# EAGLE board ArtNet_Node_v2 (EAGLE 7.0.0)
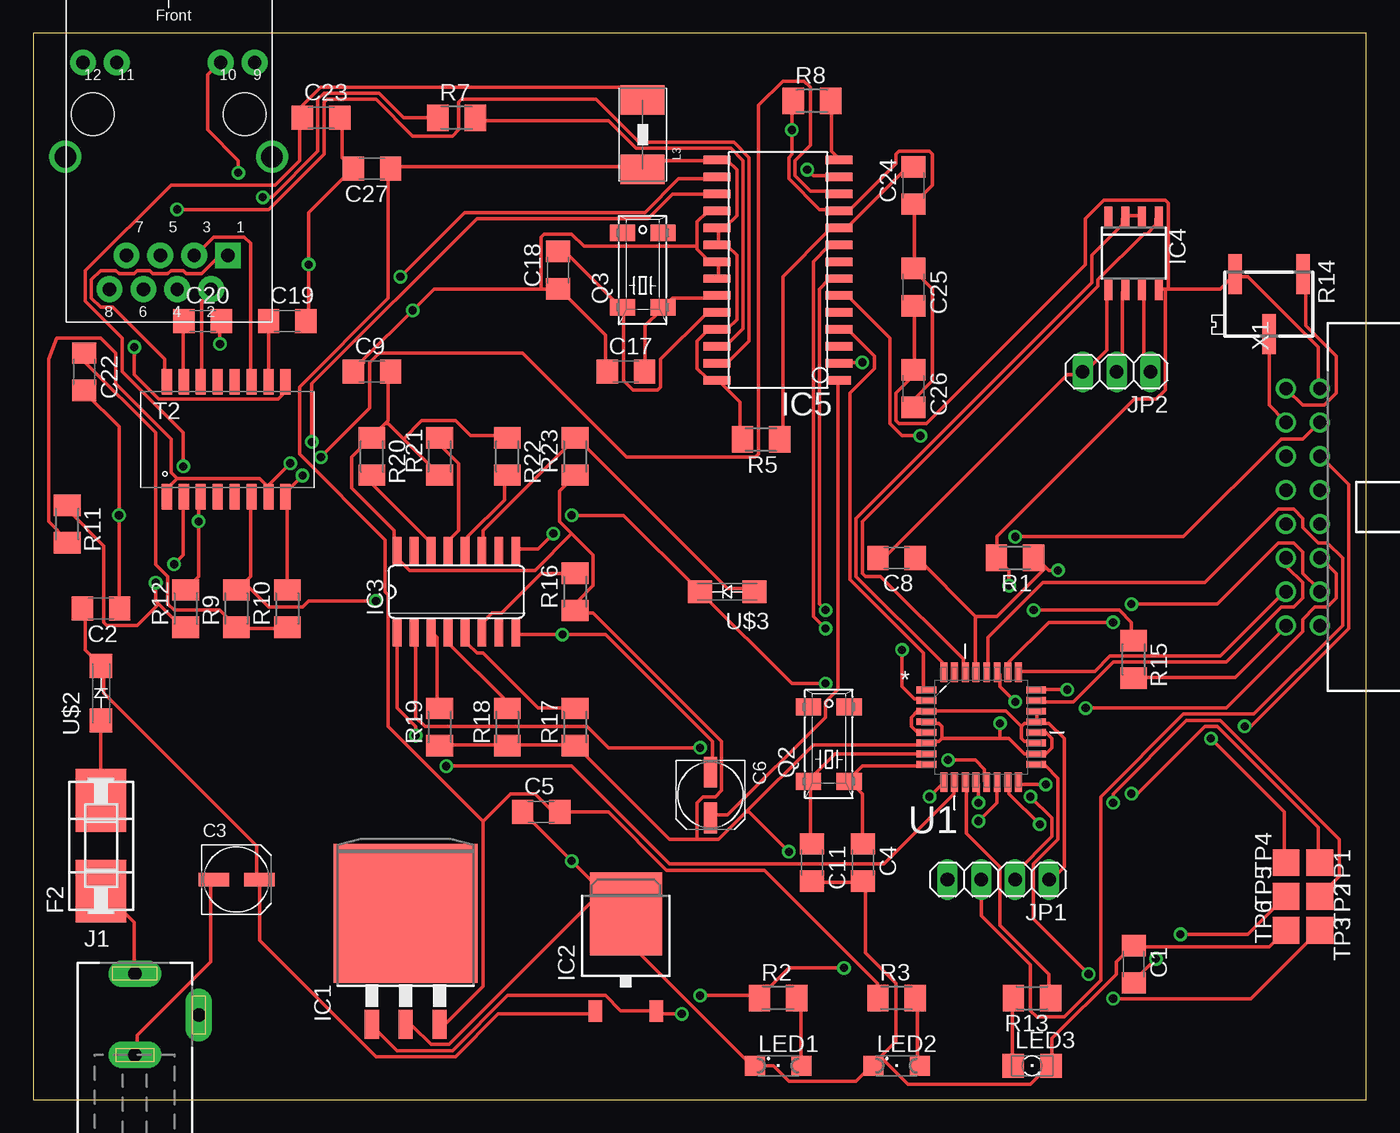
[diagram p0: board, top side]
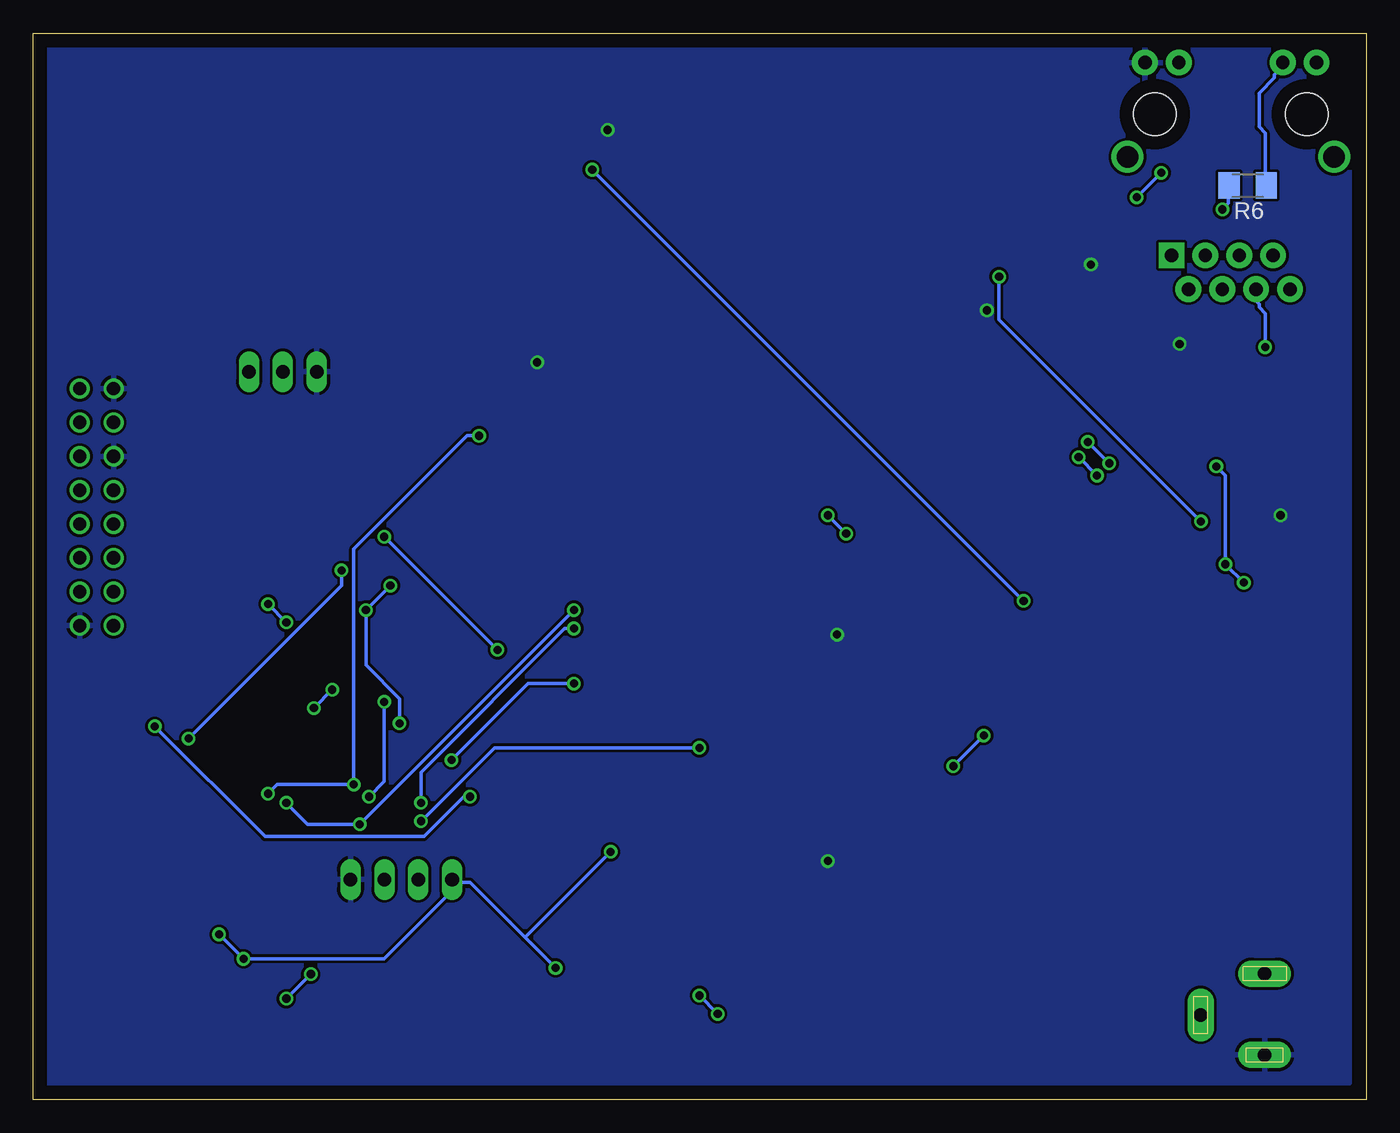
[diagram p1: board, bottom side, seen from below]

Size 100 x 80 mm. Coordinates in mm from the lower left corner, seen from the top.
Outline: 0,0 100,0 100,80 0,80 0,0
Copper layers (1*16): Top 0.035mm / dielectric 1.5mm / Bottom 0.035mm
Design rules "default": minimum track width 10mil, minimum drill 24mil, track to track 8mil, track to pad 8mil, pad to pad 8mil, via to via 8mil, smd to smd 8mil, copper to edge 40mil, drill to drill 8mil, minimum pad ring 10mil, minimum via ring 8mil, stop-mask expansion 4mil, vias tented up to drill 0mil, thermal gap 10mil
Net classes: 0 default: clearance 0.205 mm

## Footprints (pad centres in the part's own frame; a part is rotated, then mirrored left to right if it is on the bottom)
C1206 = smd 1.6 x 1.8: 1 -1.4,0; 2 1.4,0
UD-5X5,8_NICHICON = smd 2.3 x 1: + 1.725,0; - -1.7,0
OMNIBLOK = smd 4.7 x 3.8: P$1 -3.4,0; P$2 3.4,0
TO263-3 = smd 1.067 x 2.159: 1 -2.54,-5.791; 2 0,-5.791; 3 2.54,-5.791 | smd 10.8 x 10.41: TAB 0,2.54
TO252 = smd 1 x 1.6: 1 -2.28,-4.8; 2 2.28,-4.8 | smd 5.4 x 6.2: 3 0,2.5
SO16 = smd 0.66 x 2.032: 1 -4.445,-3.073; 2 -3.175,-3.073; 3 -1.905,-3.073; 4 -0.635,-3.073; 5 0.635,-3.073; 6 1.905,-3.073; 7 3.175,-3.073; 8 4.445,-3.073; 9 4.445,3.073; 10 3.175,3.073; 11 1.905,3.073; 12 0.635,3.073; 13 -0.635,3.073; 14 -1.905,3.073; 15 -3.175,3.073; 16 -4.445,3.073
D_R-PDSO-G8 = smd 0.6 x 1.5: 1 -1.905,-2.75; 2 -0.635,-2.75; 3 0.635,-2.75; 4 1.905,-2.75; 5 1.905,2.75; 6 0.635,2.75; 7 -0.635,2.75; 8 -1.905,2.75
SO28W = smd 0.635 x 1.778: 1 -8.255,-4.572 | smd 0.635 x 2.032: 2 -6.985,-4.572; 3 -5.715,-4.572; 4 -4.445,-4.572; 5 -3.175,-4.572; 6 -1.905,-4.572; 7 -0.635,-4.572; 8 0.635,-4.572; 9 1.905,-4.572; 10 3.175,-4.572; 11 4.445,-4.572; 12 5.715,-4.572; 13 6.985,-4.572; 14 8.255,-4.572; 15 8.255,4.572; 16 6.985,4.572; 17 5.715,4.572; 18 4.445,4.572; 19 3.175,4.572; 20 1.905,4.572; 21 0.635,4.572; 22 -0.635,4.572; 23 -1.905,4.572; 24 -3.175,4.572; 25 -4.445,4.572; 26 -5.715,4.572; 27 -6.985,4.572; 28 -8.255,4.572
DCJ0202 = drill 1 pad 2 long: 1 0,3.1; 2 4.8,0; 3 0,-3
1X04 = drill 1.016 long: 1 -3.81,0; 2 -1.27,0; 3 1.27,0; 4 3.81,0
1X03 = drill 1.016 long: 1 -2.54,0; 2 0,0; 3 2.54,0
WE-SMD_7427930 = smd 2.2 x 3.3: 1 -2.6,0; 2 2.6,0
SML1206 = smd 1.5 x 1.5: A 1.75,0; C -1.75,0
1206 = smd 1.6 x 1.803: A -1.422,0; C 1.422,0
MM20SS = smd 1.27 x 1.88: 1 -2.794,-1.524; 2 2.794,-1.524; 3 2.794,1.524; 4 -2.794,1.524
M1206 = smd 1.6 x 2: 1 -1.4,0; 2 1.4,0
RTRIMTS63X = smd 1 x 3: 1 -2.55,-2.25; 2 0,2.25; 3 2.55,-2.25
WE-LAN_10/100_BASETX_7490100111 = smd 1.91 x 0.76: 1 -4.317,3.945; 2 -4.317,2.675; 3 -4.317,1.405; 4 -4.317,0.135; 5 -4.317,-1.135; 6 -4.317,-2.405; 7 -4.317,-3.675; 8 -4.317,-4.945; 9 4.317,-4.945; 10 4.317,-3.675; 11 4.317,-2.405; 12 4.317,-1.135; 13 4.317,0.135; 14 4.317,1.405; 15 4.317,2.675; 16 4.317,3.945
TP20SQ = smd 2 x 2: TP 0,0
QFP80P900X900X120-32N = smd 1.473 x 0.508: 1 -4.115,2.794; 2 -4.115,2.007; 3 -4.115,1.194; 4 -4.115,0.406; 5 -4.115,-0.406; 6 -4.115,-1.194; 7 -4.115,-2.007; 8 -4.115,-2.794; 17 4.115,-2.794; 18 4.115,-2.007; 19 4.115,-1.194; 20 4.115,-0.406; 21 4.115,0.406; 22 4.115,1.194; 23 4.115,2.007; 24 4.115,2.794 | smd 0.508 x 1.473: 9 -2.794,-4.115; 10 -2.007,-4.115; 11 -1.194,-4.115; 12 -0.406,-4.115; 13 0.406,-4.115; 14 1.194,-4.115; 15 2.007,-4.115; 16 2.794,-4.115; 25 2.794,4.115; 26 2.007,4.115; 27 1.194,4.115; 28 0.406,4.115; 29 -0.406,4.115; 30 -1.194,4.115; 31 -2.007,4.115; 32 -2.794,4.115
1XRJ45_MM_JACK = drill 1.6: CASEGND -7.75,-4.2; P$2 7.75,-4.2 | drill 1 pad 1.93: GND 0.635,-14.13; L1 6.44,2.88; L2 3.9,2.88; L3 -6.44,2.88; L4 -3.9,2.88; P$9 -0.635,-11.59; RX0 -4.445,-14.13; RX+ 1.905,-11.59; RX- -1.905,-14.13; TX0 -3.175,-11.59; TX- 3.175,-14.13 | drill 1 pad 1.93 square: TX+ 4.445,-11.59 | hole 3.2: 5.7,-1; -5.7,-1
SMA-DO214AC = smd 1.8 x 1.7: A -2.05,0; K 2.05,0
PAK100/2500-5-16 = drill 1 pad 1.422: 1 -8.89,-1.27; 2 -8.89,1.27; 3 -6.35,-1.27; 4 -6.35,1.27; 5 -3.81,-1.27; 6 -3.81,1.27; 7 -1.27,-1.27; 8 -1.27,1.27; 9 1.27,-1.27; 10 1.27,1.27; 11 3.81,-1.27; 12 3.81,1.27; 13 6.35,-1.27; 14 6.35,1.27; 15 8.89,-1.27; 16 8.89,1.27

## Placement (x,y rotation side)
C1  100n  [C1206]  82.55,10.16 270 top
C2  100n  [C1206]  5.08,36.83 180 top
C3  10Âµ  [UD-5X5,8_NICHICON]  15.24,16.51 0 top
C4  22p  [C1206]  62.23,17.78 270 top
C5  100n  [C1206]  38.1,21.59 0 top
C6  10Âµ  [UD-5X5,8_NICHICON]  50.8,22.86 270 top
C8  100n  [C1206]  64.77,40.64 180 top
C9  100n  [C1206]  25.4,54.61 0 top
C11  22p  [C1206]  58.42,17.78 270 top
C17  22p  [C1206]  44.45,54.61 0 top
C18  22p  [C1206]  39.37,62.23 90 top
C19  1n  [C1206]  19.05,58.42 0 top
C20  1n  [C1206]  12.7,58.42 0 top
C22  10n  [C1206]  3.81,54.61 270 top
C23  10n  [C1206]  21.59,73.66 0 top
C24  100n  [C1206]  66.04,68.58 90 top
C25  100n  [C1206]  66.04,60.96 270 top
C26  100n  [C1206]  66.04,53.34 270 top
C27  100n  [C1206]  25.4,69.85 180 top
F2  FUSE  [OMNIBLOK]  5.08,19.05 90 top
IC1  LM2937  [TO263-3]  27.94,11.43 0 top
IC2  7805DT  [TO252]  44.45,11.43 0 top
IC3  74LS165D  [SO16]  31.75,38.1 0 top
IC4  75176AD  [D_R-PDSO-G8]  82.55,63.5 180 top
IC5  ENC28J60-SO  [SO28W]  55.88,62.23 90 top
J1  DCJ0202  [DCJ0202]  7.62,6.35 0 top
JP1  [1X04]  72.39,16.51 180 top
JP2  [1X03]  81.28,54.61 180 top
L3  [WE-SMD_7427930]  45.72,72.39 90 top
LED1  [SML1206]  55.88,2.54 0 top
LED2  [SML1206]  64.77,2.54 0 top
LED3  [1206]  74.93,2.54 0 top
Q2  25Mhz  [MM20SS]  59.69,26.67 90 top
Q3  25Mhz  [MM20SS]  45.72,62.23 90 top
R1  10k  [M1206]  73.66,40.64 180 top
R2  820  [M1206]  55.88,7.62 0 top
R3  180  [M1206]  64.77,7.62 0 top
R5  10k  [M1206]  54.61,49.53 180 top
R6  180  [M1206]  8.89,68.58 180 bottom
R7  180  [M1206]  31.75,73.66 0 top
R8  2,7k  [M1206]  58.42,74.93 0 top
R9  47  [M1206]  15.24,36.83 90 top
R10  47  [M1206]  19.05,36.83 90 top
R11  47  [M1206]  2.54,43.18 270 top
R12  47  [M1206]  11.43,36.83 90 top
R13  180  [M1206]  74.93,7.62 180 top
R14  [RTRIMTS63X]  92.71,59.69 180 top
R15  180  [M1206]  82.55,33.02 270 top
R16  10k  [M1206]  40.64,38.1 90 top
R17  10k  [M1206]  40.64,27.94 90 top
R18  10k  [M1206]  35.56,27.94 90 top
R19  10k  [M1206]  30.48,27.94 90 top
R20  10k  [M1206]  25.4,48.26 270 top
R21  10k  [M1206]  30.48,48.26 90 top
R22  10k  [M1206]  35.56,48.26 270 top
R23  10k  [M1206]  40.64,48.26 90 top
T2  WE-LAN  [WE-LAN_10/100_BASETX_7490100111]  13.97,49.53 90 top
TP1  TPSQTP20SQ  [TP20SQ]  96.52,17.78 270 top
TP2  TPSQTP20SQ  [TP20SQ]  96.52,15.24 270 top
TP3  TPSQTP20SQ  [TP20SQ]  96.52,12.7 270 top
TP4  TPSQTP20SQ  [TP20SQ]  93.98,17.78 90 top
TP5  TPSQTP20SQ  [TP20SQ]  93.98,15.24 90 top
TP6  TPSQTP20SQ  [TP20SQ]  93.98,12.7 90 top
U1  ATMEGA328P-AU  [QFP80P900X900X120-32N]  71.12,27.94 0 top
U$1  [1XRJ45_MM_JACK]  10.16,74.93 0 top
U$2  GF1  [SMA-DO214AC]  5.08,30.48 90 top
U$3  GF1  [SMA-DO214AC]  52.07,38.1 180 top
X1  2516-5  [PAK100/2500-5-16]  95.25,44.45 270 top

## Library data of the parts
C1-C6 C8 C9 C11 C17-C20 C22-C27 R1-R3 R5-R13 R15-R23 = rcl
F2 = f-lf-omniblok-s
IC1 IC2 = linear
IC3 = 74xx-us
IC4 = 751xx
IC5 = enc28j60centered
J1 = con-jack; OC_FARNELL: unknown; OC_NEWARK: unknown
JP1 JP2 = pinhead
L3 T2 = wuerth_elektronik_eisos__v6.5
LED1-LED3 = led
Q2 Q3 = crystal
R14 = resistor
TP1-TP6 = testpad
U1 = Atmel_By_element14_Batch_1-00; MPN: ATMEGA328P-AU; OC_FARNELL: 1715486; OC_NEWARK: 14R4631; PACKAGE: TQFP-32; SUPPLIER: Atmel
U$1 = con-ppt_prj006
U$2 U$3 = diode
X1 = con-3m; MPN: D2516-5002-AR; OC_FARNELL: 9838376; OC_NEWARK: 12P7055

## Nets
+3V3: C5.2 C27.1 IC1.3 IC5.15 IC5.19 IC5.20 IC5.25 IC5.28 L3.1 R3.1 R5.2
DIR_IO: IC4.2 IC4.3 U1.32
ETH_CS: IC5.9 U1.12
ETH_INT: IC5.4 U1.1
GND: C1.1 C2.1 C3.- C4.2 C5.1 C6.- C8.2 C9.1 C11.2 C17.1 C18.1 C19.2 C20.2 C22.2 C23.2 C24.1 C25.1 C26.2 C27.2 IC1.2 IC2.3 IC3.8 IC4.5 IC5.2 IC5.11 IC5.18 IC5.21 IC5.22 J1.3 JP1.1 JP2.3 LED1.C LED2.C LED3.C R8.1 R14.1 TP6.TP U1.3 U1.5 U1.19 U1.21 U1.22 U$1.L1 X1.1 X1.5 X1.16
INT_IO: IC3.11 R23.2 U$3.A
L2: R6.1 U$1.L4
L3: R7.1 U$1.L2
MISO: IC5.6 TP1.TP U1.16
MOSI: IC5.7 TP2.TP U1.15
N$1: T2.16 U$1.TX+
N$2: C19.1 T2.10
N$3: T2.14 U$1.TX-
N$4: C20.1 T2.15
N$5: IC5.8
N$6: F2.P$2 U$2.A
N$7: T2.11 U$1.RX+
N$8: T2.9 U$1.RX-
N$9: IC4.7 JP2.1
N$10: F2.P$1 J1.1
N$11: IC5.27 R6.2
N$12: JP1.2 U1.27
N$13: IC4.6 JP2.2
N$14: IC5.26 R7.2
N$15: C2.2 C3.+ IC2.1 U$2.K
N$16: LED2.A R3.2
N$20: C18.2 IC5.24 Q3.4
N$21: C17.2 IC5.23 Q3.1
N$22: IC5.12 R10.2 T2.8
N$23: IC5.13 R9.2 T2.6
N$24: IC5.16 R12.2 T2.3
N$25: IC5.17 R11.2 T2.1 T2.7
N$26: IC5.14 R8.2
N$27: C6.+ IC5.1
N$28: JP1.3 U1.28
N$29: C22.1 R9.1 R10.1
N$30: C24.2 IC5.10 R5.1
N$31: LED1.A R2.2
N$33: R13.1 U1.11
N$34: R14.2 X1.3
N$35: LED3.A R13.2
N$38: R15.2 X1.15
N$39: IC3.12 R22.2
N$40: IC3.13 R21.2
N$41: IC3.14 R20.2
N$42: IC3.3 R19.2
N$43: IC3.4 R18.2
N$44: IC3.5 R17.2
N$45: IC3.6 R16.2
N$54: C4.1 Q2.1 U1.8
N$55: C11.1 Q2.4 U1.7
N$248: C23.1 L3.2 R11.1 R12.1 T2.2
PC0: U1.23 X1.11
PC1: U1.24 X1.12
PC2: U1.25 X1.13
PC3: U1.26 X1.14
PD4: U1.2 X1.4
PD5: U1.9 X1.6
PISO1: IC3.1 U1.10
PISO2: IC3.2 U1.14
PISO3: IC3.9 U1.13 U$3.K
RESET: C8.1 R1.1 TP4.TP U1.29
RXD: IC4.1 U1.30
S$1: U$1.L3
SCK: TP3.TP U1.17
TXD: IC4.4
VCC: C1.2 C9.2 C25.2 C26.1 IC1.1 IC2.2 IC3.16 IC4.8 JP1.4 R1.2 R2.1 R14.3 R15.1 R16.1 R17.1 R18.1 R19.1 R20.1 R21.1 R22.1 R23.1 TP5.TP U1.4 U1.6 U1.18 U1.20 X1.2

## Tracks (layer width: path | path; a pad name or v marks a point on that pad's centre or on a via)
+3V3
  Top 0.254: R5.2 53.01,49.57 53.01,52.33 51.41,53.93 IC5.28 51.18,54.16 50.49,54.16 49.8,54.85 49.8,56.92 50.49,57.6 51.18,57.6 IC5.25 51.41,57.83 52.1,57.83 52.78,58.52 52.78,63.34 52.1,64.03 51.41,64.03 IC5.20 51.41,64.26 51.41,65.18 IC5.19 51.41,65.41 51.87,65.41 52.78,66.33 52.78,69.77 52.1,70.46 51.41,70.46 IC5.15 51.18,70.46 46.36,70.46 45.9,70 L3.1 45.67,70 26.85,70 C27.1 26.62,69.77 26.62,60.13 19.97,53.47 19.97,48.42 26.39,42 26.39,38.1 26.62,37.87 26.62,28 33.74,20.88 | 33.74,20.88 35.8,22.95 37.64,22.95 38.78,21.8 39.47,21.8 C5.2 39.7,21.57 43.15,21.57 47.51,17.21 54.85,17.21 63.34,8.72 63.34,7.8 R3.1 | 33.74,20.88 33.74,8.49 30.98,5.74 30.52,5.74 IC1.3
DIR_IO
  Top 0.254: U1.32 68.16,32.13 68.16,32.82 61.74,39.24 61.74,43.6 79.41,61.28 79.41,63.34 81.7,65.64 81.7,66.1 IC4.3 81.93,66.33 83.08,66.33 IC4.2
ETH_CS  (via drill 0.61)
  Top 0.254: v70.92,22.26 70.92,23.64 U1.12 | v59.44,35.34 58.52,36.26 58.52,62.88 59.67,64.03 60.36,64.03 IC5.9
  Bottom 0.254: v70.92,22.26 70.92,24.56 60.13,35.34 v59.44,35.34
ETH_INT
  Top 0.254: U1.1 66.78,30.75 66.78,33.51 61.28,39.02 61.28,53.01 63.11,54.85 63.11,55.77 61.28,57.6 60.59,57.6 IC5.4
GND  (via drill 0.61)
  Top 0.254: 42.69,15.61 44.29,14 IC2.3 | 42.69,15.61 v40.39,17.9 36.72,21.57 C5.1 | 42.69,15.61 31.21,4.13 29.84,4.13 28.46,5.51 28,5.51 IC1.2 | 42.69,15.61 IC2.3 | C11.2 58.52,16.29 62.19,16.29 C4.2 62.42,16.29 62.42,11.02 64.72,8.72 64.72,4.36 63.57,3.21 | LED2.C 62.88,2.52 61.74,1.38 56.69,1.38 55.54,2.52 54.16,2.52 LED1.C 53.93,2.52 44.52,11.93 44.52,13.77 IC2.3 | 63.57,3.21 63.11,2.75 LED2.C | TP6.TP 93.86,12.62 92.72,11.47 82.62,11.47 C1.1 82.39,11.47 81.24,10.33 81.24,9.41 76.42,4.59 76.42,2.75 LED3.C 76.19,2.52 74.82,1.15 65.64,1.15 63.57,3.21 | 63.57,3.21 LED2.C | IC5.22 51.41,61.74 51.41,62.65 IC5.21 51.18,62.88 50.72,62.88 49.8,63.8 49.8,64.03 | 49.8,64.03 49.8,65.87 50.49,66.56 51.18,66.56 IC5.18 | 38.1,60.82 39.24,60.82 C18.1 39.47,60.82 42.92,57.38 42.92,54.62 C17.1 | 38.1,60.82 30.06,60.82 v28.46,59.21 24.79,55.54 24.79,55.31 24.1,54.62 C9.1 | 49.8,64.03 41.31,64.03 40.39,64.95 38.33,64.95 38.1,64.72 38.1,60.82 | R8.1 56.92,74.82 v56.92,72.75 56.92,70.92 56.69,70.69 56.69,69.08 58.98,66.78 60.36,66.78 IC5.11 60.59,66.78 61.28,66.78 64.72,70.23 64.72,70.92 64.95,71.14 67.24,71.14 67.47,70.92 67.47,68.62 66.1,67.24 C24.1 66.1,67.01 66.1,62.42 C25.1 66.1,62.19 67.47,60.82 67.47,53.93 66.1,52.56 66.1,52.1 C26.2 | IC3.8 36.26,34.88 v39.7,34.88 42.92,34.88 50.95,26.85 50.95,24.79 C6.- | C2.1 6.43,36.95 v6.43,43.83 6.43,50.49 3.9,53.01 C22.2 | C19.2 20.66,58.52 v20.66,62.65 20.66,66.56 23.87,69.77 C27.2 23.87,70 23.18,70.69 23.18,73.44 C23.2 | U1.5 66.78,27.54 66.33,27.54 65.87,28 65.87,28.69 66.33,29.15 66.78,29.15 U1.3 67.01,29.15 72.98,29.15 74.13,28
  Top 0.254: 74.13,28 74.13,27.08 74.36,26.85 75.05,26.85 U1.19 | 74.13,28 74.36,28.23 75.05,28.23 U1.21 | U1.22 75.28,28.92 75.28,28.46 U1.21 | IC4.5 80.56,60.59 80.56,56.23 78.95,54.62 JP2.3 78.72,54.39 77.57,54.39 64.03,40.85 63.57,40.85 C8.2 | v14,56.69 14,58.29 C20.2 | v62.19,55.31 60.59,55.31 IC5.2 | C3.- 13.31,16.29 13.31,10.33 7.8,4.82 7.8,3.44 J1.3 | R14.1 95.47,61.74 95.47,58.06 97.77,55.77 97.77,53.01 96.85,52.1 95.24,52.1 94.09,53.24 X1.1 | U1.21 75.28,28.23 76.19,28.23 77.34,27.08 77.34,17.44 76.42,16.52 JP1.1
  pour Bottom: 1.27,78.74 99.06,78.74 99.06,1.27 1.27,1.27
INT_IO
  Top 0.254: U$3.A 53.93,38.33 52.1,38.33 40.85,49.57 R23.2 40.62,49.57 33.74,42.69 33.74,41.31 IC3.11
L2
  Bottom 0.254: R6.1 7.57,68.62 7.57,72.52 8.03,72.98 8.03,75.5 6.88,76.65 6.88,76.88 6.43,77.34 6.43,77.8 U$1.L4
L3  (via drill 0.61)
  Top 0.254: v17.21,67.7 17.9,67.7 21.34,71.14 21.34,75.05 21.8,75.5 25.93,75.5 27.77,73.67 30.29,73.67 R7.1 | v15.38,69.54 15.38,70.46 13.08,72.75 13.08,76.88 14,77.8 U$1.L2
  Bottom 0.254: v15.38,69.54 v17.21,67.7
MISO  (via drill 0.61)
  Top 0.254: v75.97,23.64 74.13,23.64 U1.16 | v82.39,22.95 82.85,22.95 87.9,28 88.82,28 96.39,20.43 96.39,17.9 TP1.TP | v66.56,49.8 65.18,49.8 64.26,50.72 64.26,57.15 61.28,60.13 60.59,60.13 IC5.6
  Bottom 0.254: v82.39,22.95 81.7,23.64 v75.97,23.64 75.97,41.31 67.47,49.8 v66.56,49.8
MOSI  (via drill 0.61)
  Top 0.254: v75.5,20.66 73.21,22.95 73.21,23.64 U1.15 | v81.01,22.26 81.01,22.95 86.52,28.46 89.05,28.46 98,19.51 98,16.75 96.62,15.38 TP2.TP | v59.44,36.72 58.98,37.18 58.98,60.82 59.67,61.51 60.36,61.51 IC5.7
  Bottom 0.254: v81.01,22.26 79.41,20.66 v75.5,20.66 v59.44,36.72
N$1
  Top 0.254: T2.16 9.87,53.93 9.87,55.54 5.97,59.44 5.05,59.44 4.36,60.13 4.36,61.51 5.05,62.19 6.2,62.19 6.43,61.97 7.57,61.97 7.8,62.19 8.72,62.19 8.95,61.97 10.1,61.97 10.33,62.19 11.24,62.19 11.47,61.97 12.62,61.97 13.77,63.11 14.46,63.11 U$1.TX+
N$2
  Top 0.254: C19.1 17.67,58.29 17.67,53.93 T2.10
N$3
  Top 0.254: T2.14 12.62,53.93 12.62,59.9 13.31,60.59 U$1.TX-
N$4
  Top 0.254: C20.1 11.24,58.29 11.24,53.93 T2.15
N$6
  Top 0.254: U$2.A 5.05,28.23 5.05,22.49 F2.P$2
N$7
  Top 0.254: T2.11 16.29,53.93 16.29,64.26 15.84,64.72 13.54,64.72 12.16,63.34 U$1.RX+
N$8  (via drill 0.61)
  Top 0.254: v7.57,56.46 7.57,54.39 9.41,52.56 18.36,52.56 18.82,53.01 18.82,53.7 T2.9
  Bottom 0.254: v7.57,56.46 7.57,58.98 8.03,59.44 8.03,59.67 8.26,59.9 8.26,60.59 U$1.RX-
N$9
  Top 0.254: IC4.7 83.31,60.59 83.31,55.08 83.77,54.62 JP2.1
N$10
  Top 0.254: J1.1 7.57,9.64 7.57,13.31 5.28,15.61 F2.P$1
N$11  (via drill 0.61)
  Top 0.254: v10.79,66.78 17.67,66.78 21.8,70.92 21.8,74.82 22.03,75.05 25.7,75.05 28.46,72.29 31.44,72.29 31.9,72.75 31.9,74.82 32.13,75.05 42.23,75.05 45.44,71.83 52.56,71.83 53.7,70.69 53.7,56.92 52.1,55.31 51.41,55.31 IC5.27
  Bottom 0.254: v10.79,66.78 10.33,67.24 10.33,68.39 R6.2
N$12  (via drill 0.61)
  Top 0.254: v73.67,29.84 72.52,30.98 72.52,31.9 U1.27 | v74.82,22.72 76.42,21.11 76.42,19.74 73.67,16.98 73.67,16.52 JP1.2
  Bottom 0.254: v73.67,29.84 73.67,23.87 v74.82,22.72
N$13
  Top 0.254: IC4.6 81.7,60.59 81.7,54.85 81.47,54.62 JP2.2
N$14
  Top 0.254: R7.2 33.28,73.44 43.15,73.44 45.21,71.37 52.33,71.37 53.24,70.46 53.24,57.83 52.1,56.69 51.41,56.69 IC5.26
N$15
  Top 0.254: C2.2 3.9,36.72 3.9,33.74 5.05,32.59 U$2.K 5.28,32.36 5.28,30.52 16.75,19.05 16.75,16.52 C3.+ 16.98,16.29 16.98,11.93 25.7,3.21 31.67,3.21 34.88,6.43 42,6.43 IC2.1
N$16
  Top 0.254: LED2.A 66.33,2.75 66.33,7.57 R3.2
N$20
  Top 0.254: C18.2 39.47,63.57 39.93,63.57 44.06,59.44 Q3.4 44.29,59.21 44.29,53.93 44.98,53.24 46.82,53.24 47.05,53.47 47.05,55.54 50.49,58.98 51.18,58.98 IC5.24
N$21
  Top 0.254: C17.2 45.9,54.62 45.9,58.06 47.05,59.21 Q3.1 47.28,59.44 47.97,60.13 51.18,60.13 IC5.23
N$22  (via drill 0.61)
  Top 0.254: R10.2 19.05,38.33 19.05,45.21 T2.8 18.82,45.44 v20.2,46.82 | v21.57,48.2 25.25,51.87 25.25,55.31 25.93,56 36.72,56 44.52,48.2 54.16,48.2 54.39,48.42 54.39,74.59 56.23,76.42 57.83,76.42 58.29,75.97 58.29,71.6 57.15,70.46 57.15,69.31 58.29,68.16 60.36,68.16 IC5.12
  Bottom 0.254: v20.2,46.82 v21.57,48.2
N$23  (via drill 0.61)
  Top 0.254: 15.84,38.78 15.38,38.33 R9.2 15.84,38.78 | 15.84,38.78 16.29,39.24 16.29,45.21 T2.6 | v58.06,69.77 58.52,69.31 60.36,69.31 IC5.13 | v25.7,37.41 20.66,37.41 20.2,36.95 17.67,36.95 15.84,38.78
  Bottom 0.254: v25.7,37.41 v58.06,69.77
N$24  (via drill 0.61)
  Top 0.254: T2.3 12.39,45.21 v12.39,43.38 12.39,39.24 11.47,38.33 R12.2 | v27.54,61.74 32.36,66.56 45.9,66.56 48.42,69.08 51.18,69.08 IC5.16
  Bottom 0.254: v27.54,61.74 27.54,58.52 v12.39,43.38
N$25  (via drill 0.61)
  Top 0.254: 10.79,46.59 10.1,45.9 10.1,45.44 T2.1 | 10.79,46.59 16.98,46.59 17.44,46.13 17.44,45.9 | 17.44,45.9 17.44,45.44 T2.7 17.44,45.9 | 10.79,46.59 10.33,47.05 10.33,49.57 6.2,53.7 6.2,56 5.05,57.15 1.75,57.15 1.15,55.54 1.15,43.38 2.52,42 R11.2 | v20.88,49.34 20.88,53.7 33.28,66.1 46.13,66.1 47.97,67.93 51.18,67.93 IC5.17 | 17.44,45.9 v19.28,47.74
  Bottom 0.254: v19.28,47.74 v20.88,49.34
N$26
  Top 0.254: R8.2 59.9,74.82 59.9,71.14 60.36,70.69 IC5.14
N$27
  Top 0.254: IC5.1 60.36,53.93 60.36,30.75 59.44,29.84 59.44,28.69 52.1,21.34 50.95,21.34 C6.+
N$28
  Top 0.254: U1.28 71.6,32.13 71.6,34.65 75.73,38.78 87.9,38.78 93.41,44.29 94.55,44.29 95.24,43.6 95.24,42.92 96.39,41.77 97.08,41.77 98.23,40.62 98.23,35.57 91.57,28.92 86.29,28.92 80.1,22.72 80.1,8.95 77.34,6.2 75.28,6.2 74.82,6.66 74.82,10.1 71.14,13.77 71.14,16.29 JP1.3
N$29
  Top 0.254: C22.1 3.9,56 3.9,55.31 9.18,50.03 9.18,40.16 10.1,39.24 10.1,37.18 10.56,36.72 14,36.72 15.15,35.57 R9.1 15.38,35.34 19.05,35.34 R10.1
N$30
  Top 0.254: C24.2 65.87,69.77 65.41,69.77 61.05,65.41 60.59,65.41 IC5.10 60.36,65.18 59.67,65.18 56.23,61.74 56.23,49.57 R5.1
N$31
  Top 0.254: LED1.A 57.6,2.75 57.6,7.34 57.38,7.57 R2.2
N$33
  Top 0.254: U1.11 70,23.64 70,19.97 72.52,17.44 72.52,13.08 76.19,9.41 76.19,7.8 R13.1
N$34
  Top 0.254: R14.2 92.72,57.38 92.72,52.1 93.86,50.95 X1.3
N$35
  Top 0.254: LED3.A 73.44,2.75 73.44,7.57 R13.2
N$38
  Top 0.254: R15.2 82.62,31.67 90.19,31.67 93.86,35.34 X1.15
N$39
  Top 0.254: R22.2 35.34,46.82 35.34,44.98 32.59,42.23 32.59,41.31 IC3.12
N$40
  Top 0.254: R21.2 30.52,49.57 30.52,49.11 31.9,47.74 31.9,42.69 31.21,42 31.21,41.31 IC3.13
N$41
  Top 0.254: R20.2 25.47,46.82 25.47,46.13 29.84,41.77 29.84,41.31 IC3.14
N$42
  Top 0.254: R19.2 30.29,29.38 30.29,34.65 30.06,34.88 IC3.3
N$43
  Top 0.254: R18.2 35.34,29.38 35.34,30.06 31.21,34.2 31.21,34.88 IC3.4
N$44
  Top 0.254: R17.2 40.62,29.38 37.87,29.38 33.74,33.51 33.28,33.51 32.59,34.2 32.59,34.88 IC3.5
N$45
  Top 0.254: R16.2 40.62,39.47 38.1,39.47 35.11,36.49 34.42,36.49 33.74,35.8 33.74,35.11 IC3.6
N$54
  Top 0.254: U1.8 66.78,25.02 62.19,25.02 61.28,24.1 Q2.1 61.28,23.87 62.19,22.95 62.19,19.28 C4.1
N$55
  Top 0.254: U1.7 66.78,25.93 60.13,25.93 58.29,24.1 Q2.4 58.29,23.87 58.29,19.28 C11.1
N$248  (via drill 0.61)
  Top 0.254: v10.56,40.16 11.24,40.85 11.24,45.21 T2.2 | v9.18,38.78 9.18,37.41 9.41,37.18 | 9.41,37.18 11.24,35.34 R12.1 | 9.41,37.18 7.8,35.57 5.51,35.57 5.28,35.8 5.28,41.54 2.75,44.06 2.75,44.52 R11.1 | L3.2 45.67,75.05 44.75,75.97 21.57,75.97 20.2,74.59 C23.1 19.97,73.44 19.97,70.46 18.13,68.62 10.33,68.62 3.9,62.19 3.9,59.9 6.66,57.15 6.66,54.62 11.24,50.03 v11.24,47.51
  Bottom 0.254: v9.18,38.78 v10.56,40.16 10.56,46.82 v11.24,47.51
PC0
  Top 0.254: U1.23 75.28,29.84 78.03,29.84 81.01,32.82 89.5,32.82 93.64,36.95 94.55,36.95 95.24,37.64 95.24,38.78 94.09,39.93 94.09,40.62 X1.11
PC1  (via drill 0.61)
  Top 0.254: v77.57,30.75 75.28,30.75 U1.24 | v78.95,29.38 89.5,29.38 95.24,35.11 95.24,36.03 96.16,36.95 97.08,36.95 97.77,37.64 97.77,39.47 96.62,40.62 X1.12
  Bottom 0.254: v78.95,29.38 v77.57,30.75
PC2
  Top 0.254: U1.25 74.13,32.13 79.64,32.13 80.78,33.28 89.05,33.28 93.86,38.1 X1.13
PC3  (via drill 0.61)
  Top 0.254: v81.01,35.8 76.19,35.8 73.21,32.82 73.21,32.13 U1.26 | v82.39,37.18 88.82,37.18 93.41,41.77 94.55,41.77 95.24,41.08 95.24,39.47 96.39,38.33 X1.14
  Bottom 0.254: v82.39,37.18 v81.01,35.8
PD4  (via drill 0.61)
  Top 0.254: v65.18,33.74 65.18,30.98 66.1,30.06 66.78,30.06 U1.2 | v73.67,42.23 86.29,42.23 93.64,49.57 95.24,49.57 96.39,50.72 X1.4
  Bottom 0.254: v73.67,42.23 v65.18,33.74
PD5  (via drill 0.61)
  Top 0.254: v67.24,22.72 68.16,23.64 U1.9 | v90.88,28 91.34,28 98.69,35.34 98.69,46.13 96.62,48.2 X1.6
  Bottom 0.254: v67.24,22.72 67.7,22.72 70.69,19.74 82.62,19.74 v90.88,28
PISO1  (via drill 0.61)
  Top 0.254: v30.98,25.02 40.39,25.02 47.74,17.67 63.8,17.67 69.08,22.95 69.08,23.64 U1.10 | v28.69,27.31 28.69,28 27.31,29.38 27.31,34.88 IC3.1
  Bottom 0.254: v28.69,27.31 v30.98,25.02
PISO2  (via drill 0.61)
  Top 0.254: v70.92,20.88 72.29,22.26 72.29,23.64 U1.14 | v50.03,26.39 43.15,26.39 41.54,28 29.38,28 28.69,28.69 28.69,34.88 IC3.2
  Bottom 0.254: v70.92,20.88 65.41,26.39 v50.03,26.39
PISO3  (via drill 0.61)
  Top 0.254: v68.62,25.47 70.69,25.47 71.37,24.79 71.37,23.87 U1.13 | v59.44,31.21 56.92,31.21 U$3.K 49.8,38.33 44.29,43.83 v40.39,43.83 | v39.02,42.46 37.87,41.31 36.26,41.31 IC3.9
  Bottom 0.254: v68.62,25.47 62.88,31.21 v59.44,31.21 | v40.39,43.83 v39.02,42.46
RESET  (via drill 0.61)
  Top 0.254: 70.69,36.26 70.69,32.13 U1.29 | 70.69,36.26 66.33,40.62 C8.1 | v88.36,27.08 93.86,21.57 93.86,17.9 TP4.TP | v76.88,39.7 76.19,39.7 75.97,39.93 | 75.97,39.93 75.28,40.62 R1.1 | 70.69,36.26 72.29,36.26 75.97,39.93
  Bottom 0.254: v88.36,27.08 76.88,38.56 v76.88,39.7
RXD
  Top 0.254: U1.30 69.77,32.13 69.77,33.05 63.57,39.24 62.42,39.24 62.19,39.47 62.19,43.38 79.87,61.05 79.87,61.51 83.31,64.95 83.54,64.95 84.23,65.64 84.23,66.1 IC4.1
SCK  (via drill 0.61)
  Top 0.254: v79.18,9.41 75.05,13.54 75.05,17.67 76.88,19.51 76.88,24.1 75.97,25.02 75.28,25.02 U1.17 | v81.01,7.57 91.34,7.57 96.39,12.62 TP3.TP
  Bottom 0.254: v81.01,7.57 v79.18,9.41
VCC  (via drill 0.61)
  Top 0.254: v84.23,10.56 82.62,8.95 C1.2 | v86.06,12.39 91.11,12.39 93.86,15.15 TP5.TP | IC1.1 25.47,5.51 27.31,3.67 31.44,3.67 35.57,7.8 42.92,7.8 44.06,6.66 46.59,6.66 IC2.2 46.82,6.43 v48.65,6.43 | v50.03,7.8 54.39,7.8 R2.1 54.62,7.8 56.69,9.87 v60.82,9.87 | C25.2 66.1,59.44 66.1,54.85 C26.1 65.87,54.62 65.87,54.16 64.72,53.01 64.72,50.95 64.95,50.72 67.01,50.72 78.95,62.65 78.95,66.1 80.33,67.47 84.92,67.47 85.14,67.24 85.14,60.82 | 85.14,60.82 89.05,60.82 89.96,61.74 R14.3 90.19,61.74 91.11,61.74 96.39,56.46 96.39,53.47 X1.2 | 85.14,60.82 84.92,60.82 | 84.92,60.82 84.46,60.82 IC4.8 | 84.92,60.82 84.92,53.24 84.23,52.56 82.62,52.56 72.29,42.23 72.29,40.85 R1.2 72.29,40.62 73.21,39.7 v73.21,38.56 | v75.05,36.72 81.47,36.72 82.39,35.8 82.39,34.42 R15.1 | 40.39,42.46 39.47,43.38 39.47,45.67 40.62,46.82 R23.1 | 40.39,42.46 42,40.85 42,38.56 40.85,37.41 40.85,36.72 R16.1 40.85,36.49 42,36.49 51.64,26.85 51.64,23.18 51.18,22.72 50.26,22.72 49.8,22.26 49.8,19.51 | 26.39,50.72 25.47,49.8 R20.1 25.25,49.57 23.87,48.2 23.87,45.9 27.08,42.69 27.08,41.31 IC3.16 27.31,41.08 27.31,40.62 28.23,39.7 37.64,39.7 40.39,42.46 | 26.39,50.72 26.62,50.95 26.62,54.39 C9.2 | 27.77,49.57 26.62,50.72 26.39,50.72 | 27.77,49.57 30.29,47.05 R21.1 | 27.77,49.57 29.15,50.95 31.67,50.95 32.82,49.8 35.34,49.8 R22.1 | 68.16,27.08 67.93,26.85 67.01,26.85 U1.6 66.78,26.62 58.52,26.62 53.47,21.57 | 68.16,27.08 68.16,28 67.93,28.23 67.01,28.23 U1.4 | U1.20 75.28,27.54 75.97,27.54 76.42,27.08 76.42,26.39 75.97,25.93 75.28,25.93 U1.18 75.05,25.93 74.36,25.93 73.21,27.08 72.52,27.08
  Top 0.254: 72.52,27.08 68.16,27.08 | R19.1 30.52,26.62 35.34,26.62 R18.1 35.57,26.62 40.62,26.62 R17.1 40.85,26.39 47.74,19.51 49.8,19.51 | 53.47,21.57 51.41,19.51 49.8,19.51 | 72.52,27.08 v72.52,28.23 | v56.69,18.59 53.7,21.57 53.47,21.57
  Bottom 0.254: v86.06,12.39 v84.23,10.56 73.67,10.56 68.62,15.61 68.62,16.29 JP1.4 68.39,16.29 67.24,16.29 63.11,12.16 | v48.65,6.43 v50.03,7.8 | v60.82,9.87 63.11,12.16 | v73.21,38.56 v75.05,36.72 75.05,32.59 72.52,30.06 v72.52,28.23 | v56.69,18.59 63.11,12.16